# Altium PCB PCB.PcbDoc
Units mm, origin at the board's own origin, x right, y up, seen from the top; angles counter-clockwise.
Board outline 10.17 x 13.44 mm, 4 copper layers (Top Layer, Internal Plane 1, Internal Plane 2, Bottom Layer); 4 components, 7 nets, 12 pads, 0 vias.
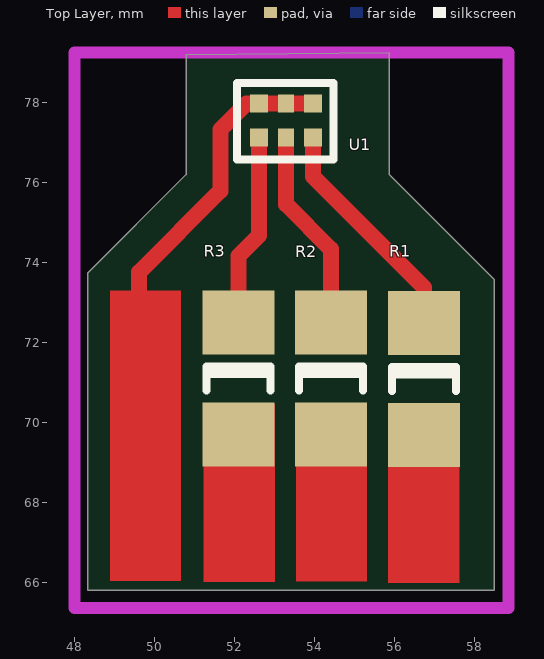
[diagram p0: Top Layer view]
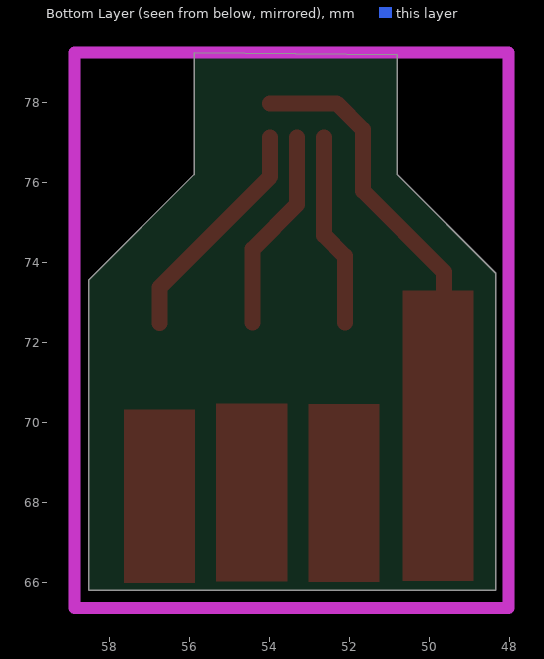
[diagram p1: Bottom Layer view, seen from below]
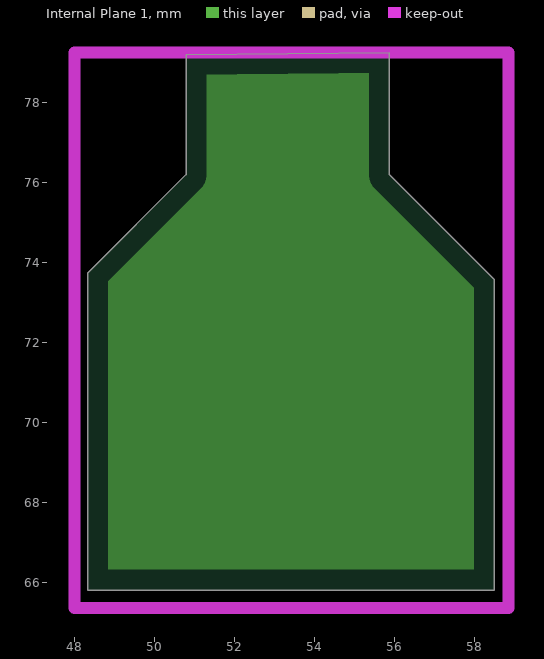
[diagram p2: Internal Plane 1, clearances drawn from the general rule]
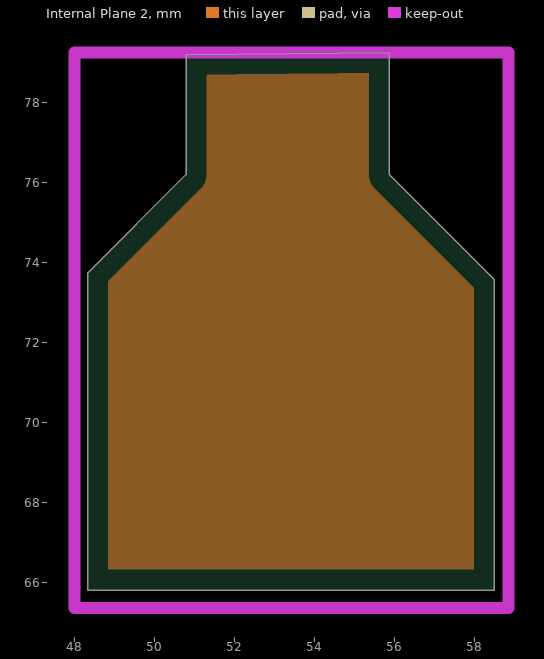
[diagram p3: Internal Plane 2, clearances drawn from the general rule]

## Layer stack, top to bottom
Top Layer: signal copper 0.0356
Dielectric: dielectric 0.32, FR-4, Dk 4.8
Internal Plane 1: plane copper 0.0356
Dielectric: dielectric 0.32, FR-4, Dk 4.8
Internal Plane 2: plane copper 0.0356
Dielectric: dielectric 0.32, FR-4, Dk 4.8
Bottom Layer: signal copper 0.0356

## Board outline
48.335,65.813 58.508,65.813 58.508,73.572 55.88,76.2 55.88,79.248 50.8,79.2 50.8,76.2 48.335,73.735

## Design rules (kind name [scope] priority, off if disabled: settings)
Clearance [All] p1: gap=0.2
PlaneClearance [All] p1: clearance=0.508
PlaneConnect [All] p1: planeconnectstyle=Relief reliefexpansion=0.508 reliefentries=4 reliefconductorwidth=0.254 reliefairgap=0.254
PolygonConnect [All] p1: connectstyle=Relief reliefconductorwidth=0.254 reliefentries=4 polygonreliefangle="90 Angle"
RoomDefinition Schematic [InComponentClass('Schematic')] p1: confinementstyle=ConfineIn formatcopy=TRUE lockcomponents=FALSE outline 48.276,65.953 58.719,65.953 58.719,79.248 48.276,79.248
RoutingVias [All] p1: holewidth=0.6 width=1 viastyle="Through Hole" minholewidth=0.711 minwidth=1.27 maxholewidth=0.711 maxwidth=1.27
SilkscreenOverComponentPads [All] p1: minsilkscreentomaskgap=0.254
SolderMaskExpansion [All] p1: expansion=0.102
Width [All] p1: maxlimit=0.4 minlimit=0.4 preferedwidth=0.4
25 further rules are at their usual default settings.

## Components (designator, comment, footprint, x,y, rotation, side; value= is the part's Value field where it differs from the comment)
R1 "Res1" 1206 56.742,71.093 r270 top
R2 "Res1" 1206 54.416,71.103 r270 top
R3 "Res1" 1206 52.109,71.1 r270 top
U1 "RGB LED" 6pin_0604 53.975,77.978 r270 top

## Footprints (in the part's own frame and the unit in brackets; to place one, negate y for a bottom-side part, rotate by r counter-clockwise, add the part's x,y. Pads: shape width x height; smd on the part's side, far side on the other; paste and mask are expansions set on the pad)
6pin_0604 [mm]
  rect 0.45x0.45 smd: 1(0,0) 3(0,-1.35) 4(0.85,-1.35) 6(0.85,0)
  rect 0.45x0.4 smd: 2(0,-0.675) 5(0.85,-0.675)
  silkscreen extent -0.51,-1.91 1.4,0.51
1206 [mm] "Chip Capacitor; Body 3.2 x 1.6 mm (LxW typ)"
  rect 1.6x1.8 smd: 1(-1.4,0) 2(1.4,0)
  silkscreen extent -0.3,-0.8 0.3,0.8

## Part data
R1 R2 R3: "Resistor"
U1: library part SMLP36RGB2W3

## Nets (pads, with @x,y where several pads share a name; then routed paths per layer and width w, separated by ;. In a path a pad name is that pad's centre, name@x,y a point inside that pad or via, vN(x,y) a via of type N, cw(c..) or ccw(c..) an arc to the next point about the centre after c; other vN are vias at no path point)
B: R1.2
G: R3.2
NetR1_1: R1.1 U1.6 | length 5.8
  Top Layer w0.4: U1.6 53.975,76.147 56.742,73.38 R1.1
NetR2_1: R2.1 U1.5 | length 5.1
  Top Layer w0.4: U1.5 53.3,75.453 54.416,74.336 R2.1
NetR3_1: R3.1 U1.4 | length 4.8
  Top Layer w0.4: R3.1 52.109,74.162 52.625,74.678 U1.4
R: R2.2
VCC: U1.1 U1.2 U1.3 | length 11.1
  Top Layer w0.4: 49.627,69.678 49.627,73.763 51.656,75.792 51.656,77.321 52.313,77.978 U1.3 U1.2 U1.1

## Polygon pours and split planes (outlines as drawn)
no net on Internal Plane 1 (split plane): 55.37,76.2 55.379,76.1 55.408,76.005 55.456,75.916 55.519,75.839 57.998,73.36 57.998,66.323 48.846,66.323 48.846,73.524 51.161,75.839 51.224,75.916 51.272,76.005 51.301,76.1 51.31,76.2 51.31,78.694 55.37,78.733
no net on Internal Plane 2 (split plane): 55.37,76.2 55.379,76.1 55.408,76.005 55.456,75.916 55.519,75.839 57.998,73.36 57.998,66.323 48.846,66.323 48.846,73.524 51.161,75.839 51.224,75.916 51.272,76.005 51.301,76.1 51.31,76.2 51.31,78.694 55.37,78.733

## Keep-outs
Keep-Out Layer:
  lines w0.3: 48.014,65.37 58.865,65.37 58.865,79.248 48.014,79.248 48.014,65.37

## Other copper
Top Layer:
  rectangle net VCC: 48.895,66.04 50.673,73.297
  rectangle net B: 55.853,65.992 57.631,70.331
  rectangle net R: 53.548,66.03 55.326,70.475
  rectangle net G: 51.238,66.013 53.016,70.458

## Dimensions
48.014,65.37 to 58.865,65.37 on Mechanical 1
48.014,65.37 to 48.014,79.248 on Mechanical 1